# Altium PCB Main_Unit.PcbDoc
Units mm, origin at the board's own origin, x right, y up, seen from the top; angles counter-clockwise.
Board outline 108 x 72 mm, 2 copper layers (Top Layer, Bottom Layer); 27 components, 27 nets, 135 pads, 104 vias.
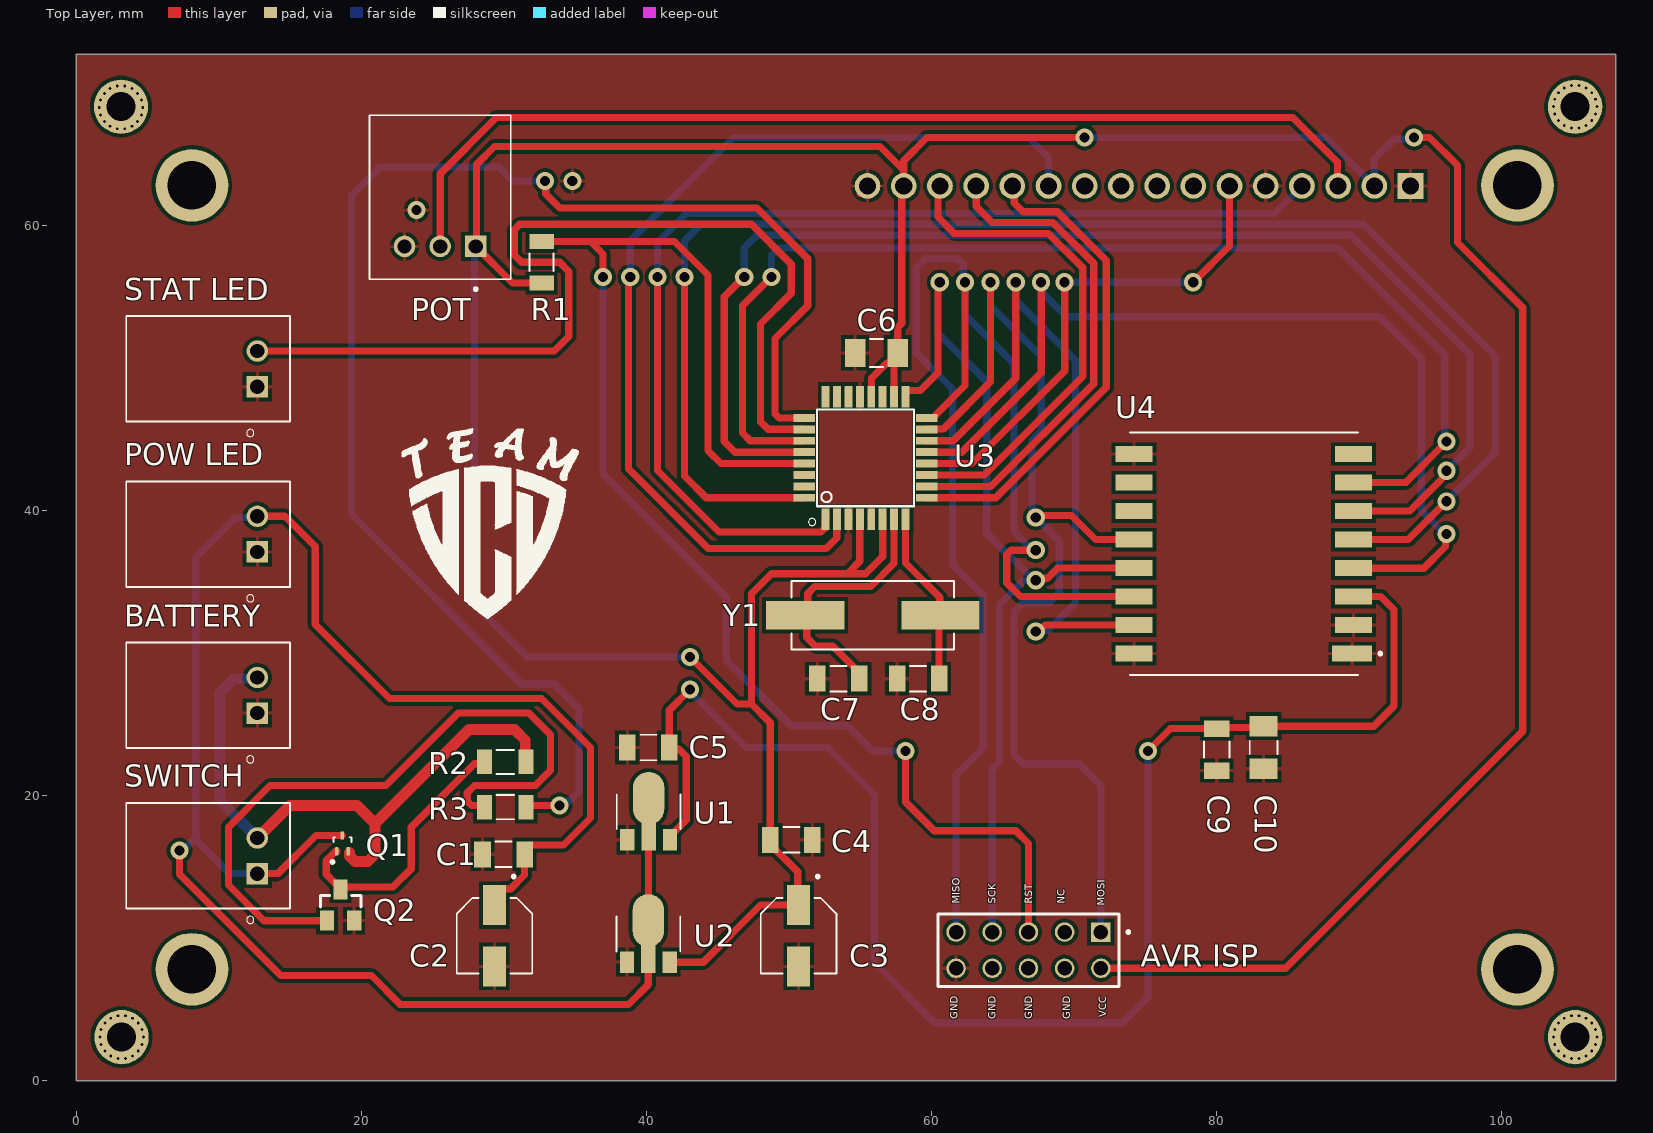
[diagram p0: Top Layer view]
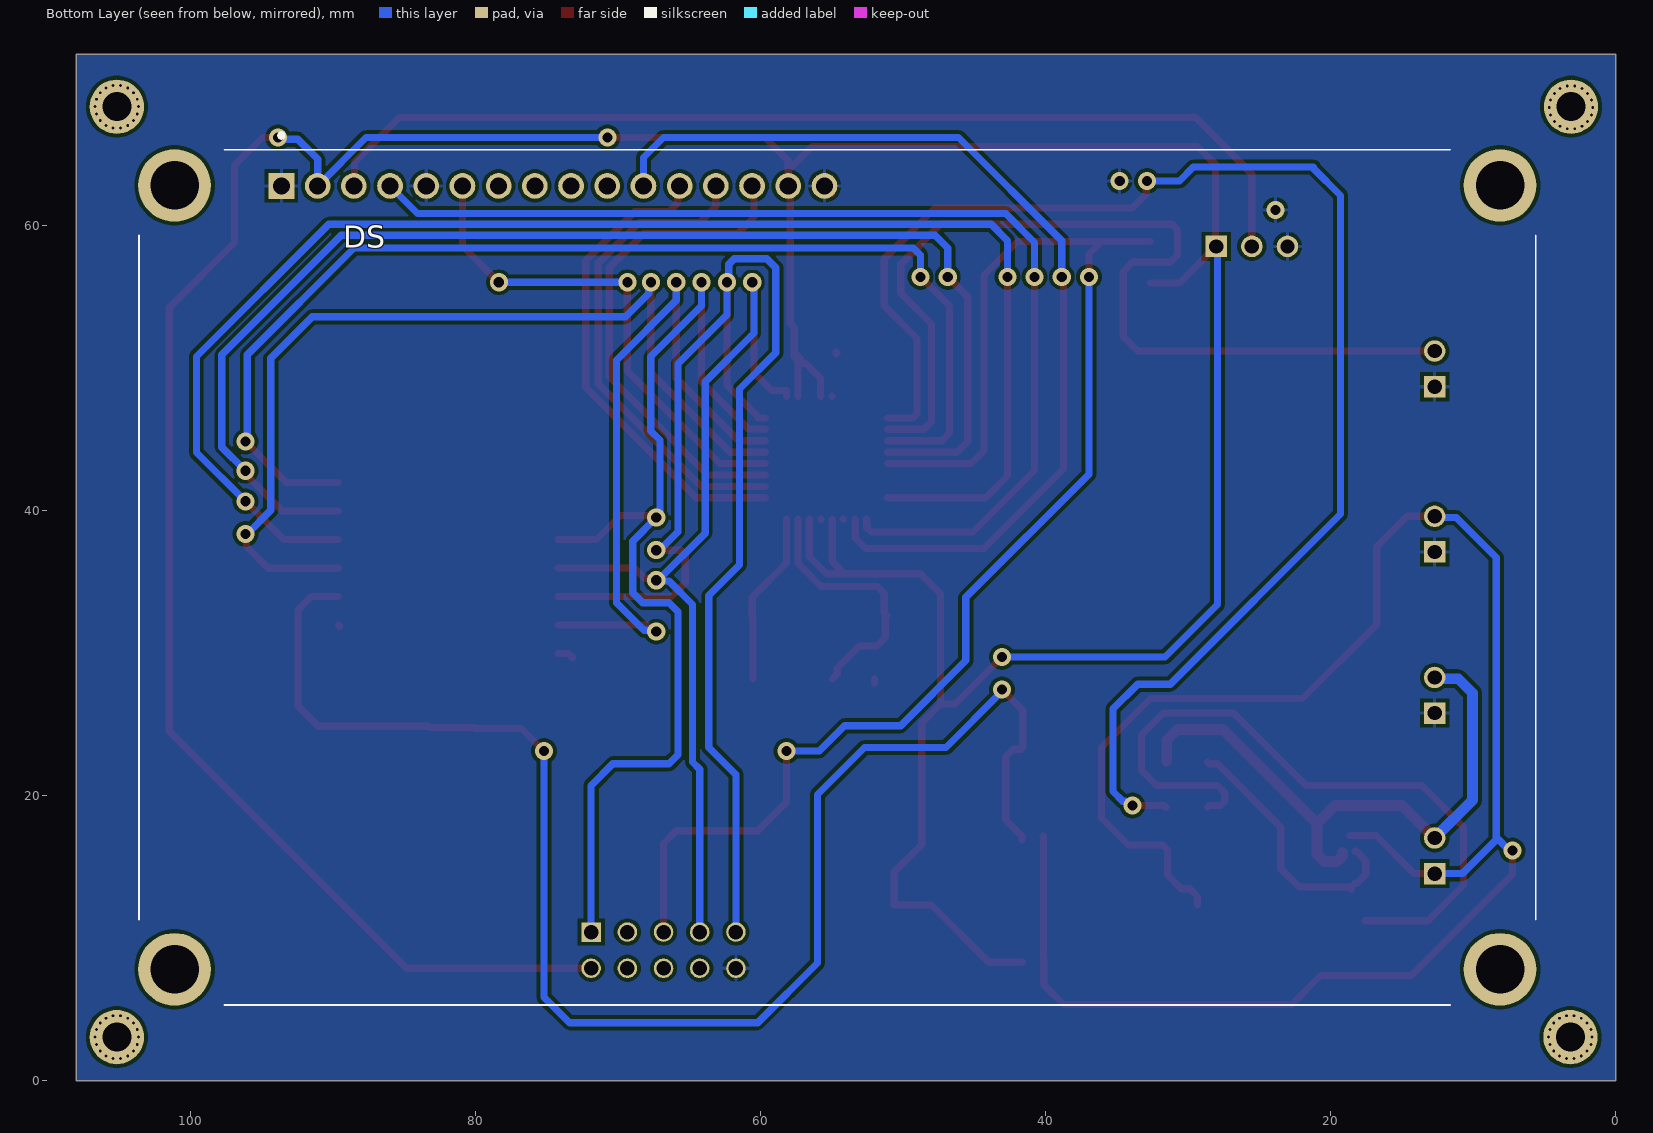
[diagram p1: Bottom Layer view, seen from below]
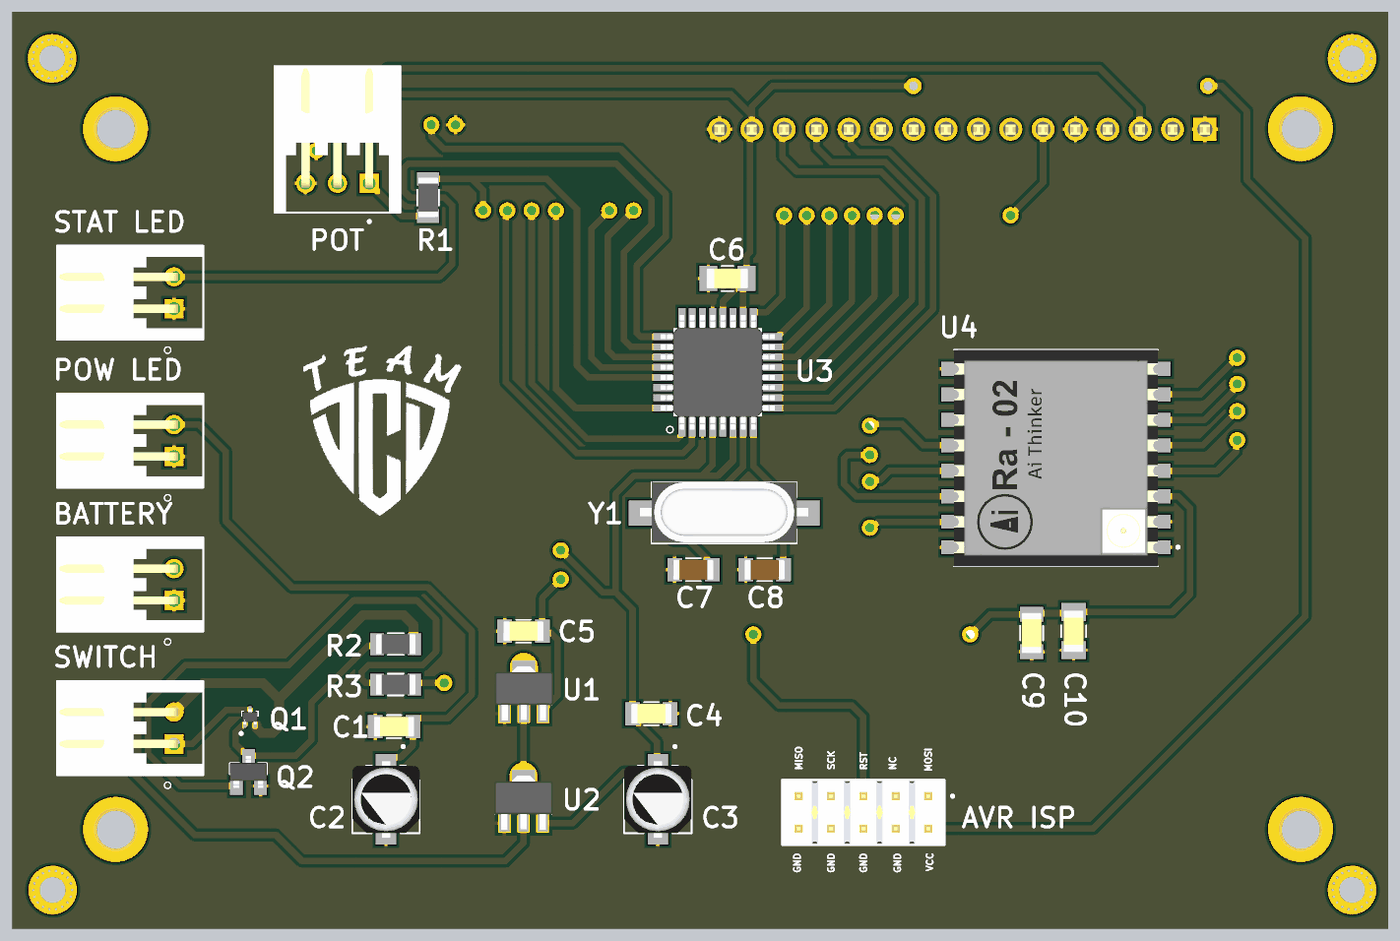
[diagram p2: 3D render of the assembled board from above, using the file's embedded part models]

## Layer stack, top to bottom
Top Solder: solder mask 0.0102, Solder Resist, Dk 3.5
Top Layer: signal copper 0.0356
Dielectric 1: dielectric 0.32, FR-4, Dk 4.8
Bottom Layer: signal copper 0.0356
Bottom Solder: solder mask 0.0102, Solder Resist, Dk 3.5

## Board outline
0,0 108,0 108,72 0,72

## Design rules (kind name [scope] priority, off if disabled: settings)
Clearance [All] p1: gap=0.254 ignorepadtopadclearanceinfootprint=FALSE except(0: Arc-Hole Track-Hole SMDPad-Hole THPad-Hole Via-Hole Fill-Hole Poly-Hole Region-Hole Text-Hole)
PolygonConnect [All] p1: connectstyle=Relief reliefconductorwidth=0.254 reliefentries=4 polygonreliefangle="90 Angle" airgapwidth=0.254
RoutingVias [All] p1: holewidth=0.711 width=1.27 viastyle="Through Hole" minholewidth=0.711 minwidth=1.27 maxholewidth=0.711 maxwidth=1.27
SolderMaskExpansion [All] p1: expansion=0.102 istentingtop=FALSE
Width [All] p1: maxlimit=0.762 minlimit=0.254 preferedwidth=0.635 minimp=50.000000 maximp=50.000000 favimp=50.000000
30 further rules are at their usual default settings.

## Components (designator, comment, footprint, x,y, rotation, side; value= is the part's Value field where it differs from the comment)
"AVR ISP" "AVR ISP" SAMTEC_TSW-105-05-L-D 71.882,10.418 r180 top (schematic designator P6)
BATTERY "Battery" JST_S2B-XH-A(LF)(SN) 12.7,27.031 r90 top (schematic designator P5)
C1 "0.1uF/16V" CAPC3216X110N 29.972,15.875 r0 top
C2 "47uF/16V" CAP_EEEFC0J470AR 29.337,10.16 r270 top
C3 "47uF/16V" CAP_EEEFC0J470AR 50.673,10.16 r270 top
C4 "0.1uF/16V" CAPC3216X110N 50.165,16.891 r180 top
C5 "0.1uF/16V" CAPC3216X110N 40.132,23.368 r0 top
C6 "1uF/16V" CAPC3316X120N 56.134,51.054 r0 top
C7 "22pF/16V" CAPC3216X88N 53.467,28.194 r0 top
C8 "22pF/16V" CAPC3216X88N 59.055,28.194 r0 top
C9 "0.1uF/16V" CAPC3216X110N 80.01,23.221 r90 top
C10 "1uF/16V" CAPC3316X120N 83.301,23.368 r90 top
DS "LCD-20X4B" LCD_LCD-20X4B 54.61,35.306 r180 bottom locked
POT "Pot" JST_S3B-XH-A(LF)(SN) 25.527,61.976 r0 top (schematic designator P1)
"POW LED" "POW LED" JST_S2B-XH-A(LF)(SN) 12.7,38.334 r90 top (schematic designator P3)
Q1 "NTK3139" SOT40P120X55-3N 18.669,16.637 r90 top
Q2 "NDS7002A" SOT23 18.542,12.319 r0 top
R1 "10k / 5%" RESC3115X65N 32.639,57.413 r90 top
R2 "10k / 5%" RESC3115X65N 30.099,22.352 r0 top
R3 "100R / 5%" RESC3115X65N 30.099,19.177 r0 top
"STAT LED" "STAT LED" JST_S2B-XH-A(LF)(SN) 12.7,49.931 r90 top (schematic designator P2)
SWITCH "Switch" JST_S2B-XH-A(LF)(SN) 12.7,15.768 r90 top (schematic designator P4)
U1 "HT7536-1" SOT89 40.157,18.872 r0 top
U2 "HT7550-1" SOT89 40.132,10.287 r0 top
U3 "ATMEGA328P-AU" QFP80P900X900X120-32N 55.372,43.688 r90 top
U4 "SX 1278" MODULE_RA-02_LORA 81.915,36.957 r180 top
Y1 "16MHz CRYSTAL" XTAL_ECS-160-20-5PVX 55.88,32.639 r180 top

## Footprints (in the part's own frame and the unit in brackets; to place one, negate y for a bottom-side part, rotate by r counter-clockwise, add the part's x,y. Pads: shape width x height; smd on the part's side, far side on the other; paste and mask are expansions set on the pad)
CAP_EEEFC0J470AR [mm]
  rect 2.8x1.6 smd: 1(-2.15,0) 2(2.15,0)
  silkscreen extent -4.25,-2.65 2.65,2.65, body extent -3,-2.65 3,2.65, height 5.8
CAPC3216X88N [mm]
  rect 1.16x1.82 smd: 1(-1.475,0) 2(1.475,0)
  silkscreen extent -0.57,-0.9 0.57,0.9, body extent -1.6,-0.8 1.6,0.8, height 0.88
CAPC3216X110N [mm]
  rect 1.16x1.82 smd: 1(-1.475,0) 2(1.475,0)
  silkscreen extent -0.57,-0.9 0.57,0.9, body extent -1.6,-0.8 1.6,0.8, height 1.1
CAPC3316X120N [mm]
  rect 1.42x1.96 smd: 1(-1.492,0) 2(1.492,0)
  silkscreen extent -0.46,-0.98 0.46,0.98, body extent -1.65,-0.8 1.65,0.8, height 1.2
JST_S2B-XH-A(LF)(SN) [mm]
  rect 1.508x1.508 hole 1: 1(-1.25,0)
  round 1.508 hole 1: 2(1.25,0)
  silkscreen extent -4.75,-2.3 3.7,9.2, body extent -3.7,-2.32 3.7,9.18, height 6.15
JST_S3B-XH-A(LF)(SN) [mm]
  rect 1.508x1.508 hole 1: 1(2.5,-3.45)
  round 1.508 hole 1: 2(0,-3.45) 3(-2.5,-3.45)
  silkscreen extent -4.95,-6.55 4.95,5.75, body extent -4.95,-5.75 4.95,5.75, height 6.15
LCD_LCD-20X4B [mm]
  rect 1.8x1.8 hole 1.2: 1(-39,27.46)
  round 1.8 hole 1.2: 2(-36.46,27.46) 3(-33.92,27.46) 4(-31.38,27.46) 5(-28.84,27.46) 6(-26.3,27.46) 7(-23.76,27.46) 8(-21.22,27.46) 9(-18.68,27.46) 10(-16.14,27.46) 11(-13.6,27.46) 12(-11.06,27.46) 13(-8.52,27.46) 14(-5.98,27.46) 15(-3.44,27.46) 16(-0.9,27.46)
  round 5.1 hole 3.4: S1(-46.5,27.5) S2(46.5,27.5) S3(-46.5,-27.5) S4(46.5,-27.5)
  silkscreen extent -49,-30 49,31.15, body extent -49.02,-30.03 48.98,29.97, height 20.06
MODULE_RA-02_LORA [mm]
  rect 2.8x1.1 smd: 1(-7.6,7)
  rect 2.6x1.1 smd: 2(-7.7,5) 3(-7.7,3) 4(-7.7,1) 5(-7.7,-1) 6(-7.7,-3) 7(-7.7,-5) 8(-7.7,-7) 9(7.7,-7) 10(7.7,-5) 11(7.7,-3) 12(7.7,-1) 13(7.7,1) 14(7.7,3) 15(7.7,5) 16(7.7,7)
  silkscreen extent -9.68,-8.5 8,8.5, body extent -8,-8.49 8,8.51, height 3.03
QFP80P900X900X120-32N [mm]
  rect 1.5x0.55 smd: 1(-4.3,2.8) 2(-4.3,2) 3(-4.3,1.2) 4(-4.3,0.4) 5(-4.3,-0.4) 6(-4.3,-1.2) 7(-4.3,-2) 8(-4.3,-2.8) 17(4.3,-2.8) 18(4.3,-2) 19(4.3,-1.2) 20(4.3,-0.4) 21(4.3,0.4) 22(4.3,1.2) 23(4.3,2) 24(4.3,2.8)
  rect 0.55x1.5 smd: 9(-2.8,-4.3) 10(-2,-4.3) 11(-1.2,-4.3) 12(-0.4,-4.3) 13(0.4,-4.3) 14(1.2,-4.3) 15(2,-4.3) 16(2.8,-4.3) 25(2.8,4.3) 26(2,4.3) 27(1.2,4.3) 28(0.4,4.3) 29(-0.4,4.3) 30(-1.2,4.3) 31(-2,4.3) 32(-2.8,4.3)
  silkscreen extent -4.75,-3.4 3.4,4, body extent -4.5,-4.5 4.5,4.5, height 1.2
RESC3115X65N [mm]
  rect 1.05x1.72 smd: 1(-1.46,0) 2(1.46,0)
  silkscreen extent -0.62,-0.85 0.62,0.85, body extent -1.55,-0.78 1.55,0.78, height 0.65
SAMTEC_TSW-105-05-L-D [mm]
  rect 1.37x1.37 hole 1.02: 01(0,0)
  round 1.37 hole 1.02: 02(0,2.54) 03(2.54,0) 04(2.54,2.54) 05(5.08,0) 06(5.08,2.54) 07(7.62,0) 08(7.62,2.54) 09(10.16,0) 10(10.16,2.54)
  silkscreen extent -2.02,-1.27 11.43,3.81, body extent -1.27,-1.27 11.43,3.81, height 5.84
SOT23 [mm]
  rect 1x1.4 smd: 1(-0.95,-1.1) 2(0.95,-1.1) 3(0,1.1)
  silkscreen extent -1.42,-0.15 1.42,0.66, body extent -1.46,-1.25 1.46,1.25, height 1.12
SOT40P120X55-3N [mm]
  rrect50% 0.59x0.25 smd: 1(-0.555,0.4) 2(-0.555,-0.4) 3(0.555,0)
  silkscreen extent -1.4,-0.63 0.43,0.8, body extent -0.6,-0.6 0.6,0.6, height 0.55
SOT89 [mm]
  rect 1x1.5 smd paste-2 mask+0: 1(-1.499,-1.981) 3(1.499,-1.981)
  rect 1x2 smd paste-2 mask+0: 2(0,-1.727)
  oval 2.2x3.7 smd paste-3: 2@1(0,0.94)
  silkscreen extent -2.23,-1.24 2.23,1.22, body extent -2.3,-2.5 2.3,1.75, height 1.35
XTAL_ECS-160-20-5PVX [mm]
  rect 5.5x2 smd: 1(-4.75,0) 2(4.75,0)
  silkscreen extent -5.7,-2.4 5.7,2.4, body extent -6.6,-2.41 6.6,2.29, height 2.6

## Part data
"AVR ISP": library part TSW-105-05-L-D, Package=None, Availability=Unavailable, MP=TSW-105-05-L-D, Price=None
BATTERY "POW LED" "STAT LED" SWITCH: library part S2B-XH-A(LF)(SN), "Connector Header Through Hole, Right Angle 2 position 0.098 _2.50mm_", Package=None, Digi-Key_Part_Number=455-2257-ND, Digi-Key_Purchase_URL=https://www.digikey.com/product-detail/en/jst-sales-america-inc/S2B-XH-A_LF__SN_/455-2257-ND/1651055?utm_source=snapeda&utm_medium=aggregator&utm_campaign=symbol, MF="JST Sales", MP=S2B-XH-A_LF__SN_, SnapEDA_Link=https://www.snapeda.com/parts/S2B-XH-A%28LF%29%28SN%29/JST%20Sales%20America%20Inc./view-part/46871/?ref=snap
C1 C4 C5 C9: library part C1206F104K4RACAUTO, Package=None, Availability=Unavailable, MP=C1206F104K4RACAUTO, Price=None
C2 C3: library part EEEFC0J470AR, "Cap Aluminum Lytic 47uF 6.3V 20% (5 X 5.4mm) SMD 95mA 1000h 105C Automotive T/R", Package="RADIAL-2 Panasonic", Availability="In Stock", Check_prices=https://www.snapeda.com/parts/EEEFC0J470AR/Panasonic/view-part/5794427/?ref=eda, MF=Panasonic, MP=EEEFC0J470AR, Price=None, Purchase-URL=https://pricing.snapeda.com/search/part/EEEFC0J470AR/?ref=eda, SnapEDA_Link=https://www.snapeda.com/parts/EEEFC0J470AR/Panasonic/view-part/5794427/?ref=snap
C6 C10: library part C1206X105J4RECAUTO, Package=None, Availability=Unavailable, MP=C1206X105J4RECAUTO, Price=None
C7 C8: library part C1206C220F4HACAUTO, Package=None, Availability=Unavailable, MP=C1206C220F4HACAUTO, Price=None
DS: "Display Development Tools 20X4 CHARACTER BLUE LCD W/BACKLIGHT", Package=None, Availability=Unavailable, MF=Gravitech, Mouser-Purchase-URL=https://snapeda.com/shop?store=Mouser&id=833821, MP=LCD-20X4B, Price=None, SnapEDA_Link=https://www.snapeda.com/parts/LCD-20X4B/Gravitech/view-part/833821/?ref=snap
POT: library part S3B-XH-A(LF)(SN), "Connector Header Through Hole, Right Angle 3 position 0.098 _2.50mm_", Package="FakePackage u", Availability=Unavailable, MF="JST Sales", MP=S3B-XH-A_LF__SN_, Price=None, SnapEDA_Link=https://www.snapeda.com/parts/S3B-XH-A%28LF%29%28SN%29/JST%20Sales%20America%20Inc./view-part/46873/?ref=snap
Q1: library part NTK3139PT1G, "P-Channel 20V 660mA (Ta) 310mW (Ta) Surface Mount SOT-723", Package="SOT-723 ON Semiconductor", Arrow_Electronics-Purchase-URL=https://snapeda.com/shop?store=Arrow+Electronics&id=302649, Arrow_Europe-Purchase-URL=https://snapeda.com/shop?store=Arrow+Europe&id=302649, Availability=Good, MF="ON Semiconductor", Mouser-Purchase-URL=https://snapeda.com/shop?store=Mouser&id=302649, MP=NTK3139PT1G, Price=None, SnapEDA_Link=https://www.snapeda.com/parts/NTK3139PT1G/ON%20Semiconductor/view-part/302649/?ref=snap
Q2: "N-Channel 60V 280mA _Ta_ 300mW _Ta_ Surface Mount SOT-23 _TO-236AB_", Package="SOT-23-3 ON Semiconductor", Availability=Unavailable, MF="ON Semiconductor", MP=NDS7002A, Price=None, SnapEDA_Link=https://www.snapeda.com/parts/NDS7002A/ON%20Semiconductor/view-part/2657545/?ref=snap
R1: library part CRGCQ1206J10K, Package="3115 TE Connectivity", Availability=Warning, DigiKey-Purchase-URL=https://snapeda.com/shop?store=DigiKey&id=3188341, MF="TE Connectivity", Mouser-Purchase-URL=https://snapeda.com/shop?store=Mouser&id=3188341, MP=CRGCQ1206J10K, Price=None, SnapEDA_Link=https://www.snapeda.com/parts/CRGCQ1206J10K/TE%20Connectivity/view-part/3188341/?ref=snap
R2: library part CRGCQ1206J10K, "Fixed Resistor CRGCQ 1206 10K 5%", Package="3115 TE Connectivity", Availability=Warning, DigiKey-Purchase-URL=https://snapeda.com/shop?store=DigiKey&id=3188341, MF="TE Connectivity", Mouser-Purchase-URL=https://snapeda.com/shop?store=Mouser&id=3188341, MP=CRGCQ1206J10K, Price=None, SnapEDA_Link=https://www.snapeda.com/parts/CRGCQ1206J10K/TE%20Connectivity/view-part/3188341/?ref=snap
R3: library part CRGCQ1206J100R, "Fixed Resistor CRGCQ 1206 100R 5%", Package=None, Availability=Unavailable, MP=CRGCQ1206J100R, Price=None
U1: library part HT7550-1, "Voltage stabiliser; LDO, fixed; 5V; 0.1A; SOT89; SMD", Package=None, Availability=Unavailable, MF=Holtek, MP=HT7550-1, Price=None, SnapEDA_Link=https://www.snapeda.com/parts/HT7550-1/Holtek/view-part/586500/?ref=snap
U2: "Voltage stabiliser; LDO, fixed; 5V; 0.1A; SOT89; SMD", Package=None, Availability=Unavailable, MF=Holtek, MP=HT7550-1, Price=None, SnapEDA_Link=https://www.snapeda.com/parts/HT7550-1/Holtek/view-part/586500/?ref=snap
U3: "AVR AVRÂ® ATmega Microcontroller IC 8-Bit 20MHz 32KB _16K x 16_ FLASH 32-TQFP _7x7_", Package="TQFP-32 Microchip", Availability=Unavailable, MF=Microchip, MP=ATMEGA328P-AU, Price=None, SnapEDA_Link=https://www.snapeda.com/parts/ATMEGA328P-AU/Microchip/view-part/44280/?ref=snap
U4: library part RA-02_LORA, "Ra-02 LoRa RF M5Stack Platform Evaluation Expansion Board", Package=Package, Availability=Unavailable, Check_prices=https://www.snapeda.com/parts/Ra-02%20LoRa/AI-Thinker/view-part/4449259/?ref=eda, MF=AI-Thinker, MP="Ra-02 LoRa", Price=None, SnapEDA_Link=https://www.snapeda.com/parts/Ra-02%20LoRa/AI-Thinker/view-part/4449259/?ref=snap
Y1: library part ECS-160-20-5PVX, "16MHz Â±30ppm Crystal 20pF 50 Ohms HC-49/US", Package="HC49/US ECS International", Availability=Unavailable, MF="ECS Inc.", MP=ECS-160-20-5PVX, Price=None, SnapEDA_Link=https://www.snapeda.com/parts/ECS-160-20-5PVX/ECS%20Inc./view-part/2721556/?ref=snap

## Free pads (board coordinates)
  round 3.81 hole 2.032: 1(105.156,68.326) 2(3.134,68.326) 3(105.156,3.048) 4(3.175,3.048)

## Via types
v1: diameter 0.508, hole 0.203, Top Layer to Bottom Layer, 72 vias
v2: diameter 1.27, hole 0.711, Top Layer to Bottom Layer, 32 vias

## Nets (pads, with @x,y where several pads share a name; then routed paths per layer and width w, separated by ;. In a path a pad name is that pad's centre, name@x,y a point inside that pad or via, vN(x,y) a via of type N, cw(c..) or ccw(c..) an arc to the next point about the centre after c; other vN are vias at no path point)
+3.6V: C5.2 C9.2 C10.2 U1.3 U4.3 | length 107.6
  Top Layer w0.508: C5.2 41.607,25.986 v2(43.053,27.432) ; U1.3 41.656,17.141 42.799,18.284 42.799,22.733 42.291,23.241 C5.2@41.734,23.241 ; v2(75.184,23.114) 76.766,24.696 C9.2 80.092,24.778 83.219,24.778 C10.2 91.027,24.86 92.456,26.289 92.456,33.02 91.519,33.957 U4.3
  Bottom Layer w0.508: v2(43.053,27.432) 43.053,27.305 46.99,23.368 52.705,23.368 56.007,20.066 56.007,8.255 60.198,4.064 73.406,4.064 75.184,5.842 v2(75.184,23.114)
+5V: "AVR ISP.02" C3.1 C4.2 C6.2 DS.2 DS.15 POT.1 R1.1 U2.3 U3.4 U3.6 U3.18 U3.20 | length 284.2
  Top Layer w0.508: R1.1 30.6,55.953 POT.1 28.067,58.566 28.067,64.262 29.337,65.532 56.388,65.532 57.935,63.985 ; U2.3 43.993,8.306 47.997,12.31 C3.1 50.609,12.374 50.609,14.642 48.69,16.561 C4.2 48.69,25.097 47.371,26.416 ; v2(43.053,29.718) 46.355,26.416 47.371,26.416 ; U3.4 54.972,36.43 54.102,35.56 ; U3.20 55.789,48.005 55.789,49.274 56.843,50.328 57.17,50.328 57.229,50.387 57.229,50.673 57.483,50.927 57.611,51.054 C6.2 ; U3.6 56.572,36.76 55.372,35.56 54.102,35.56 ; U3.18 57.372,50.328 57.372,50.53 57.626,50.784 C6.2 ; v2(70.739,66.167) 59.69,66.167 58.05,64.527 58.05,63.985 DS.15 57.912,62.628 57.912,53.127 57.626,52.841 C6.2 ; 71.882,7.878 84.84,7.878 101.473,24.511 101.473,54.229 96.901,58.801 96.901,64.209 94.943,66.167 v2(93.853,66.167) ; 47.371,26.416 47.371,34.163 48.768,35.56 54.102,35.56
  Bottom Layer w0.508: POT.1 27.94,58.439 27.94,33.401 31.623,29.718 v2(43.053,29.718) ; v2(70.739,66.167) 87.669,66.167 DS.2 91.07,64.654 92.456,66.04 93.726,66.04 v2(93.853,66.167)
"BAT +": BATTERY.2 Q1.2 R2.2 SWITCH.2 | length 43.9
  Top Layer w0.508: Q1.2 19.092,16.082 Q1.2@19.133,16.041 ; R2.2@31.496,22.415 R2.2
  Top Layer w0.762: SWITCH.2 14.986,19.304 19.685,19.304 20.955,18.034 ; Q1.2@19.158,15.993 19.177,15.974 19.177,15.748 19.558,15.367 20.447,15.367 20.955,15.875 20.955,18.034 ; R2.2@31.496,22.415 31.496,23.876 30.734,24.638 27.559,24.638 20.955,18.034
  Bottom Layer w0.508: BATTERY.2@12.613,28.194 BATTERY.2
  Bottom Layer w0.762: BATTERY.2@12.613,28.194 11.049,28.194 10.033,27.178 10.033,19.685 SWITCH.2
"BAT -": "AVR ISP.10" "POW LED.1" "STAT LED.1" BATTERY.1 C1.1 C2.2 C3.2 C4.1 C5.1 C6.1 C7.1 C8.1 C9.1 C10.1 DS.1 DS.5 DS.16 POT.3 Q2.2 U1.1 U2.1 U3.3 U3.5 U3.21 U4.1 U4.2 U4.9 U4.16 | length 4.1
  Top Layer w0.508: v2@23.495,61.087 v2(23.876,61.087) ; C7.1@51.992,27.864 C7.1 ; U3.3 U3.3@54.189,39.405 ; C6.1@54.698,51.11 C6.1 C6.1@54.7,50.996 ; U3.21 U3.21@54.989,48.005 ; DS.16@54.991,62.23 DS.16@55.51,62.749 ; U3.5@55.755,39.405 U3.5 ; U4.16@73.169,29.661 73.465,29.957 U4.16 ; DS.5 DS.5@83.566,62.65 ; U4.2@89.515,31.857 U4.2 ; DS.1@92.964,62.12 DS.1
  other v2: 34.798,63.119
D4: DS.11 U3.2 | length 69.6
  Top Layer w0.508: v2(38.862,56.388) 38.735,56.261 38.735,42.926 44.323,37.338 52.625,37.338 53.355,38.068 53.355,39.371 U3.2
  Bottom Layer w0.508: v2(38.862,56.388) 38.862,58.928 46.101,66.167 66.802,66.167 68.21,64.759 DS.11@68.21,63.013 ; DS.11@67.963,63.013 DS.11
D5: DS.12 U3.9 | length 34.1
  Top Layer w0.508: U3.9 64.51,40.888 72.263,48.641 72.263,57.527 68.83,60.96 66.421,60.96 65.81,61.571 65.81,62.626 DS.12
D6: DS.13 U3.10 | length 34.5
  Top Layer w0.508: U3.10 64.167,41.688 71.374,48.895 71.374,57.339 68.515,60.198 64.262,60.198 63.13,61.33 DS.13
D7: DS.14 U3.11 | length 35.3
  Top Layer w0.508: U3.11 63.697,42.488 70.612,49.403 70.612,57.023 68.199,59.436 61.595,59.436 60.452,60.579 60.452,62.628 DS.14
DI00: U3.32 U4.5 | length 106
  Top Layer w0.508: v2(42.672,56.388) 42.672,42.418 44.202,40.888 U3.32 ; U4.5 93.456,37.957 v2(96.139,40.64)
  Bottom Layer w0.508: v2(42.672,56.388) 42.672,58.928 43.815,60.071 90.297,60.071 99.568,50.8 99.568,44.069 v2(96.139,40.64)
DI01: U3.28 U4.6 | length 91.5
  Top Layer w0.508: v2(46.863,56.388) 45.466,54.991 45.466,44.831 46.209,44.088 U3.28 ; U4.6 93.551,39.957 93.575,39.981 95.778,42.184 95.778,42.214 96.139,42.576 v2(96.139,42.782)
  Bottom Layer w0.508: v2(46.863,56.388) 46.863,58.42 47.752,59.309 89.408,59.309 97.79,50.927 97.79,44.433 v2(96.139,42.782)
DI02: U3.27 U4.7 | length 82.3
  Top Layer w0.508: v2(48.768,56.388) 46.736,54.356 46.736,45.44 47.288,44.888 U3.27 ; U4.7 93.265,41.957 v2(96.139,44.831)
  Bottom Layer w0.508: v2(48.768,56.388) 48.768,57.912 49.276,58.42 88.519,58.42 96.012,50.927 96.012,44.958 v2(96.139,44.831)
Enable: DS.6 U3.12 | length 35.4
  Top Layer w0.508: U3.12 62.846,43.288 69.342,49.784 v2(69.342,56.007) ; v2(78.359,56.007) 80.91,58.558 DS.6
  Bottom Layer w0.508: v2(69.342,56.007) v2(78.359,56.007)
LED_2: "STAT LED.2" U3.26 | length 68.9
  Top Layer w0.508: 12.7,51.181 33.528,51.181 34.544,52.197 34.544,56.769 33.909,57.404 31.242,57.404 30.734,57.912 30.734,59.69 31.115,60.071 47.371,60.071 50.165,57.277 50.165,55.245 48.006,53.086 48.006,46.228 48.546,45.688 U3.26
MISO: "AVR ISP.09" U3.16 U4.14 | length 99.3
  Top Layer w0.508: U3.16 60.147,46.488 60.168,46.509 60.168,46.579 62.357,48.768 v2(62.357,56.007) ; v2@67.08,37.211 65.576,37.211 65.278,36.913 65.278,34.925 66.246,33.957 U4.14
  Bottom Layer w0.508: 61.722,10.418 61.722,21.463 63.627,23.368 63.627,34.036 61.468,36.195 61.468,48.514 58.928,51.054 58.928,57.023 59.563,57.658 61.849,57.658 62.23,57.277 62.23,56.134 v2(62.357,56.007) 62.357,53.721 65.786,50.292 65.786,38.505 v2@67.08,37.211
  other v2: 67.31,37.211
MOSI: "AVR ISP.01" U3.15 U4.12 | length 75.8
  Top Layer w0.508: U3.15 59.689,45.705 60.818,45.705 64.135,49.022 v2(64.135,56.007) ; v2@67.202,39.643 68.376,39.643 69.825,39.643 71.511,37.957 U4.12
  Bottom Layer w0.508: v2(64.135,56.007) 64.135,54.356 67.691,50.8 67.691,45.569 67.056,44.934 v2@67.056,39.497 ; v2(67.31,39.497) 68.961,37.846 68.961,34.225 68.264,33.528 66.421,33.528 65.786,32.893 65.786,22.86 66.421,22.225 70.358,22.225 71.882,20.701 71.882,10.418
NetC7_2: C7.2 U3.7 Y1.2 | length 18.4
  Top Layer w0.508: C7.2 54.616,28.52 54.616,28.95 53.086,30.48 51.86,30.48 51.248,31.091 51.248,32.521 Y1.2 51.308,32.817 51.308,34.163 51.816,34.671 55.753,34.671 57.372,36.29 U3.7
NetC8_2: C8.2 U3.8 Y1.1 | length 12.3
  Top Layer w0.508: U3.8 58.172,36.316 60.579,33.909 60.579,32.69 Y1.1 60.53,32.539 C8.2
NetDS_3: DS.3 POT.2 | length 72.7
  Top Layer w0.508: POT.2 25.527,63.627 29.464,67.564 85.344,67.564 88.48,64.428 88.48,62.816 DS.3
NetQ1_1: Q1.1 Q2.3 R2.1 | length 19
  Top Layer w0.508: Q1.1 18.181,16.082 17.526,15.427 17.526,14.478 18.139,13.865 18.296,13.865 18.542,13.619 Q2.3 18.712,13.589 22.225,13.589 23.495,14.859 23.495,17.78 27.94,22.225 28.512,22.225 R2.1
NetQ2_1: Q2.1 R3.1 | length 49.5
  Top Layer w0.508: Q2.1 13.165,11.219 10.668,13.716 10.668,17.78 13.589,20.701 21.717,20.701 26.797,25.781 31.75,25.781 33.274,24.257 33.274,21.779 32.196,20.701 27.94,20.701 27.432,20.193 27.432,19.602 27.73,19.304 28.512,19.304 R3.1
NSS: U3.14 U4.15 | length 49.7
  Top Layer w0.508: U3.14 61.525,44.888 65.913,49.276 v2(65.913,56.007) ; v2(67.31,31.496) 67.516,31.496 67.977,31.957 U4.15
  Bottom Layer w0.508: v2(65.913,56.007) 65.913,54.737 70.104,50.546 70.104,33.528 68.171,31.595 67.409,31.595 v2(67.31,31.496)
RESET: U3.13 U4.4 | length 67.1
  Top Layer w0.508: U3.13 62.122,44.088 67.691,49.657 v2(67.691,56.007) ; U4.4 89.631,35.941 94.537,35.941 96.065,37.469 96.065,38.28 v2(96.139,38.354)
  Bottom Layer w0.508: v2(67.691,56.007) 67.837,55.861 67.837,55.226 69.469,53.594 91.44,53.594 94.361,50.673 94.361,40.005 96.012,38.354 v2(96.139,38.354)
RS: DS.4 U3.1 | length 77.2
  Top Layer w0.508: v2(40.767,56.388) 40.767,42.799 45.085,38.481 52.253,38.481 52.551,38.779 52.551,39.367 U3.1
  Bottom Layer w0.508: v2(40.767,56.388) 40.767,58.801 42.799,60.833 84.057,60.833 DS.4
RST: "AVR ISP.05" R1.2 U3.29 | length 99.9
  Top Layer w0.508: R1.2 36.068,58.873 ; v2(36.957,56.388) 36.957,57.984 36.068,58.873 ; U3.29 45.231,43.288 44.323,44.196 44.323,56.515 41.965,58.873 36.068,58.873 ; v2@58.166,22.733 58.166,19.558 60.198,17.526 65.913,17.526 66.802,16.637 66.802,10.418
  Bottom Layer w0.508: v2(36.957,56.388) 36.957,42.545 45.593,33.909 45.593,29.464 50.165,24.892 54.102,24.892 55.88,23.114 v2(58.166,23.114)
SCK: "AVR ISP.07" U3.17 U4.13 | length 67.2
  Top Layer w0.508: U3.17 58.172,48.393 58.193,48.414 59.209,48.414 60.452,49.657 60.452,55.88 v2(60.579,56.007) ; v2@67.183,35.1 67.329,35.246 68.14,35.246 68.851,35.957 U4.13
  Bottom Layer w0.508: v2(60.579,56.007) 60.452,55.88 60.452,52.451 63.881,49.022 63.881,38.402 v2@67.183,35.1 ; 64.262,10.418 64.262,21.844 64.77,22.352 64.77,33.401 66.41,35.041 67.251,35.041 v2(67.31,35.1)
ShutDown: R3.2 U3.25 | length 104
  Top Layer w0.508: R3.2 31.686,19.304 v2(33.909,19.304) ; v2(32.893,63.119) 32.928,63.084 32.928,62.195 33.909,61.214 47.752,61.214 51.308,57.658 51.308,54.356 49.022,52.07 49.022,46.786 49.32,46.488 U3.25
  Bottom Layer w0.508: v2(32.893,63.119) 30.607,63.119 29.635,64.091 21.209,64.091 21.209,64.008 19.304,62.103 19.304,39.751 31.242,27.813 33.528,27.813 35.262,26.079 35.262,20.276 34.579,19.593 34.405,19.593 34.115,19.304 v2(33.909,19.304)
Switch: "POW LED.2" C1.2 C2.1 Q1.3 SWITCH.1 U1.2 U1.2@1 U2.2 U2.2@1 | length 137.4
  Top Layer w0.508: v2(7.239,16.129) 7.239,14.478 14.351,7.366 20.701,7.366 22.733,5.334 38.735,5.334 40.132,6.731 U2.2 40.145,8.573 40.145,11.227 40.145,17.133 U1.2 ; SWITCH.1 14.137,14.518 16.811,17.192 Q1.3 ; 12.7,39.584 14.645,39.584 16.764,37.465 16.764,32.004 21.971,26.797 32.639,26.797 36.068,23.368 36.068,18.415 34.184,16.531 31.773,16.531 31.447,16.205 31.447,14.42 30.483,13.456 29.883,13.456 29.337,12.91 C2.1
  Bottom Layer w0.508: v2(7.239,16.129) 7.445,16.129 8.207,16.891 8.382,16.891 ; SWITCH.1 10.755,14.518 8.382,16.891 ; 12.7,39.584 12.621,39.505 11.184,39.505 8.382,36.703 8.382,16.891
pads on no net: "AVR ISP.03" "AVR ISP.04" "AVR ISP.06" "AVR ISP.08" DS.7 DS.8 DS.9 DS.10 DS.S1 DS.S2 DS.S3 DS.S4 U3.19 U3.22 U3.23 U3.24 U3.30 U3.31 U4.8 U4.10 U4.11
copper on no net:
  other v1: 2.91,1.547 3.44,1.547 104.891,1.547 105.421,1.547 2.413,1.728 3.937,1.728 104.394,1.728 105.918,1.728 2.008,2.068 4.342,2.068 103.989,2.068 106.323,2.068 1.743,2.527 4.607,2.527 103.724,2.527 106.588,2.527 1.651,3.048 4.699,3.048 103.632,3.048 106.68,3.048 1.743,3.569 4.607,3.569 103.724,3.569 106.588,3.569 2.008,4.028 4.342,4.028 103.989,4.028 106.323,4.028 2.413,4.368 3.937,4.368 104.394,4.368 105.918,4.368 2.91,4.549 3.44,4.549 104.891,4.549 105.421,4.549 2.869,66.775 3.398,66.775 104.891,66.825 105.421,66.825 2.372,66.956 3.896,66.956 104.394,67.006 105.918,67.006 1.966,67.297 4.301,67.297 103.989,67.346 106.323,67.346 1.702,67.755 4.566,67.755 103.724,67.805 106.588,67.805 1.61,68.276 4.658,68.276 103.632,68.326 106.68,68.326 1.702,68.797 4.566,68.797 103.724,68.847 106.588,68.847 1.966,69.256 4.301,69.256 103.989,69.306 106.323,69.306 2.372,69.596 3.896,69.596 104.394,69.646 105.918,69.646 2.869,69.777 3.398,69.777 104.891,69.827 105.421,69.827

## Polygon pours and split planes (outlines as drawn)
"BAT -" on Bottom Layer "BOT_POUR" (solid, pour order 2): 108,72 108,0 0,0 0,72
"BAT -" on Top Layer "TOP_POUR" (solid, remove dead copper, pour order 1): 0,72 108,72 108,0 0,0

## Silkscreen, mask and mechanical layers (free items; w line width, h text height)
Top Overlay:
  drawing of 7 lines, arcs and shapes, not listed
  text "MISO" at 61.983,12.404 h0.51 r90
  text "SCK" at 64.523,12.404 h0.51 r90
  text "RST" at 67.063,12.404 h0.51 r90
  text "NC" at 69.349,12.404 h0.51 r90
  text "MOSI" at 72.143,12.277 h0.51 r90
  text "VCC" at 72.263,4.445 h0.51 r90
  text "GND" at 61.849,4.318 h0.51 r90
  text "GND" at 64.516,4.318 h0.51 r90
  text "GND" at 67.056,4.318 h0.51 r90
  text "GND" at 69.723,4.318 h0.51 r90